# EAGLE board USB_Audio_Front_2 (EAGLE 9.6.2)
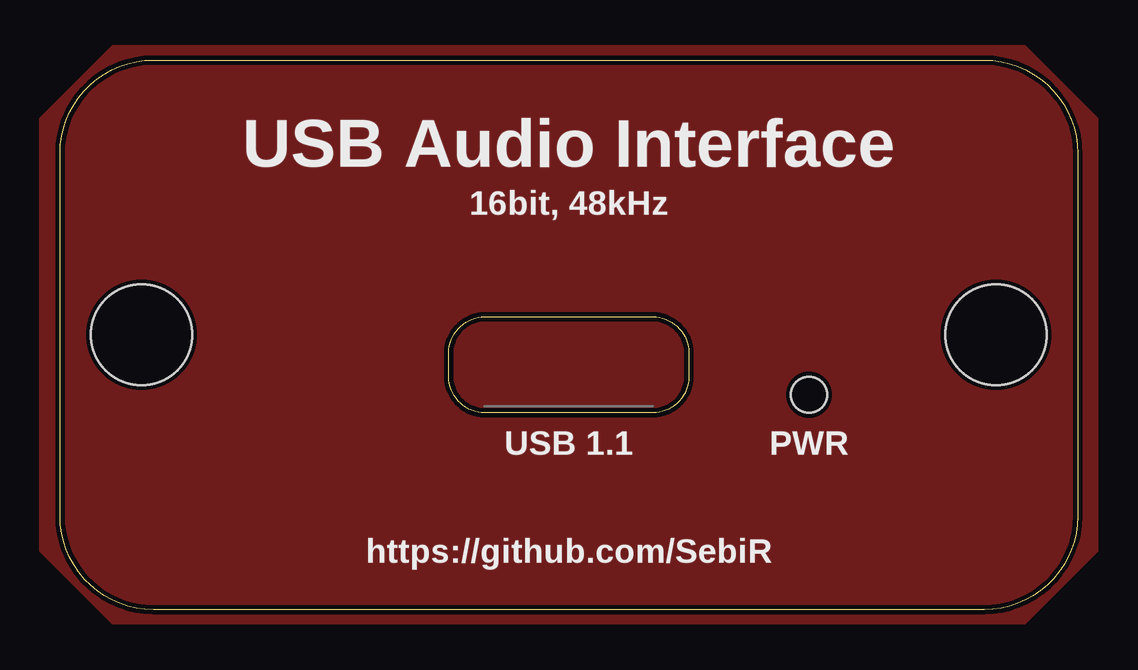
[diagram p0: board, top side]
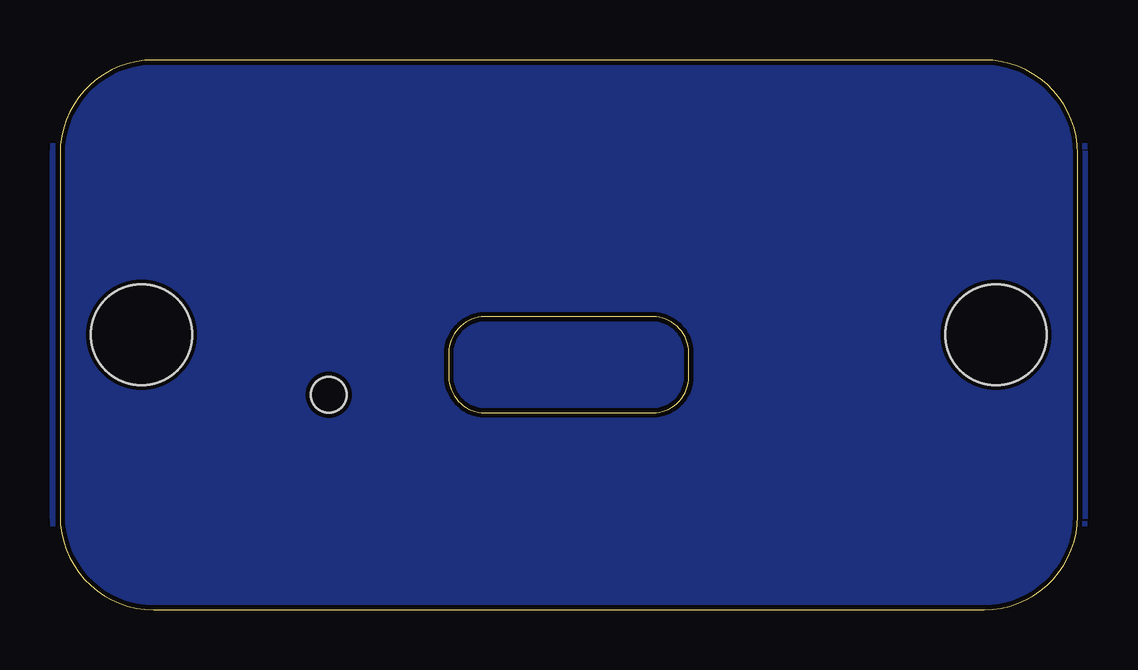
[diagram p1: board, bottom side, seen from below]

Size 42.4 x 22.9 mm. Coordinates in mm from the lower left corner, seen from the top.
Copper layers (1*16): Top 0.035mm / dielectric 1.6mm / Bottom 0.035mm
Design rules "jlcpcb-2layers": minimum track width 0.2mm, minimum drill 0.3mm, track to track 5mil, track to pad 5mil, pad to pad 5mil, via to via 5mil, smd to smd 5mil, copper to edge 0.2mm, drill to drill 6mil, minimum pad ring 10mil, minimum via ring 0.125mm, stop-mask expansion 4mil, vias tented up to drill 0.5mm, thermal gap 10mil
Holes 1.5 mm at 31.2,8.95

## Footprints (pad centres in the part's own frame; a part is rotated, then mirrored left to right if it is on the bottom)
HM_1455D601_FRONT = hole 4.2: -17.8,0; 17.8,0

## Placement (x,y rotation side)
E$1  [HM_1455D601_FRONT]  21.2,11.45 0 top
E$2  [USB_C_CUTOUT]  21.2,10.2 0 top

## Library data of the parts
E$1 E$2 = Rietig_Mechanik

## Tracks (layer width: path | path; a pad name or v marks a point on that pad's centre or on a via)
GND
  pour Bottom: 38.7,-0.05 3.7,-0.05 arc-90 -0.3,3.95 -0.3,18.95 arc-90 3.7,22.95 38.7,22.95 arc-90 42.7,18.95 42.7,3.95 arc-90
  pour Top: 40.2,23.45 43.2,20.45 43.2,2.45 40.2,-0.55 2.2,-0.55 -0.8,2.45 -0.8,20.45 2.2,23.45

## Text on the board
tPlace: USB Audio Interface | 16bit, 48kHz | USB 1.1 | PWR | https://github.com/SebiR